# Altium PCB slave.PcbDoc
Units mm, origin at the board's own origin, x right, y up, seen from the top; angles counter-clockwise.
Board outline 42.29 x 53.21 mm, 2 copper layers (Top Layer, Bottom Layer); 30 components, 26 nets, 146 pads, 23 vias.
Unrouted connection lines stored in the file: 19.
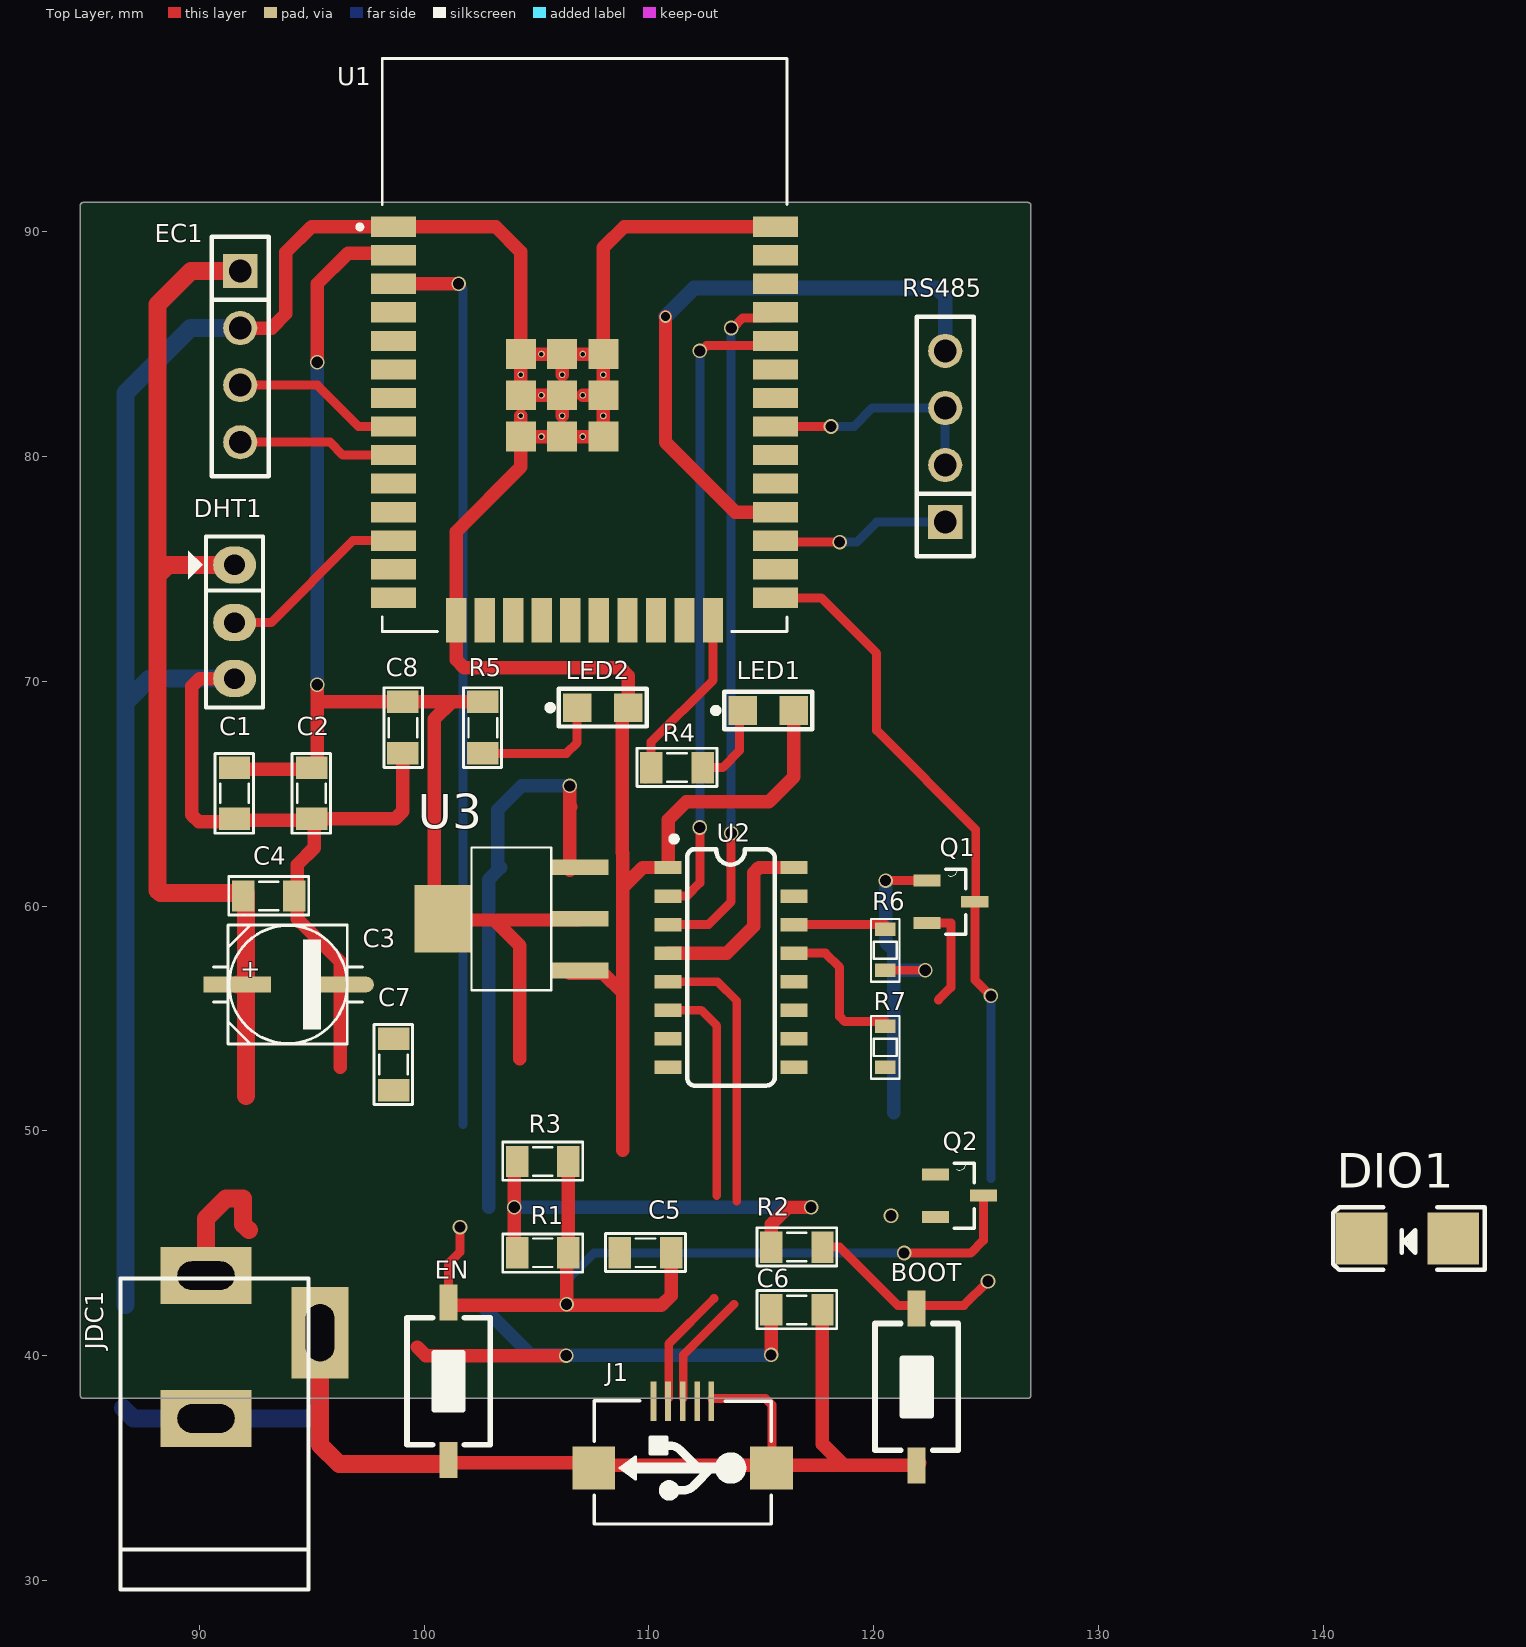
[diagram p0: Top Layer view]
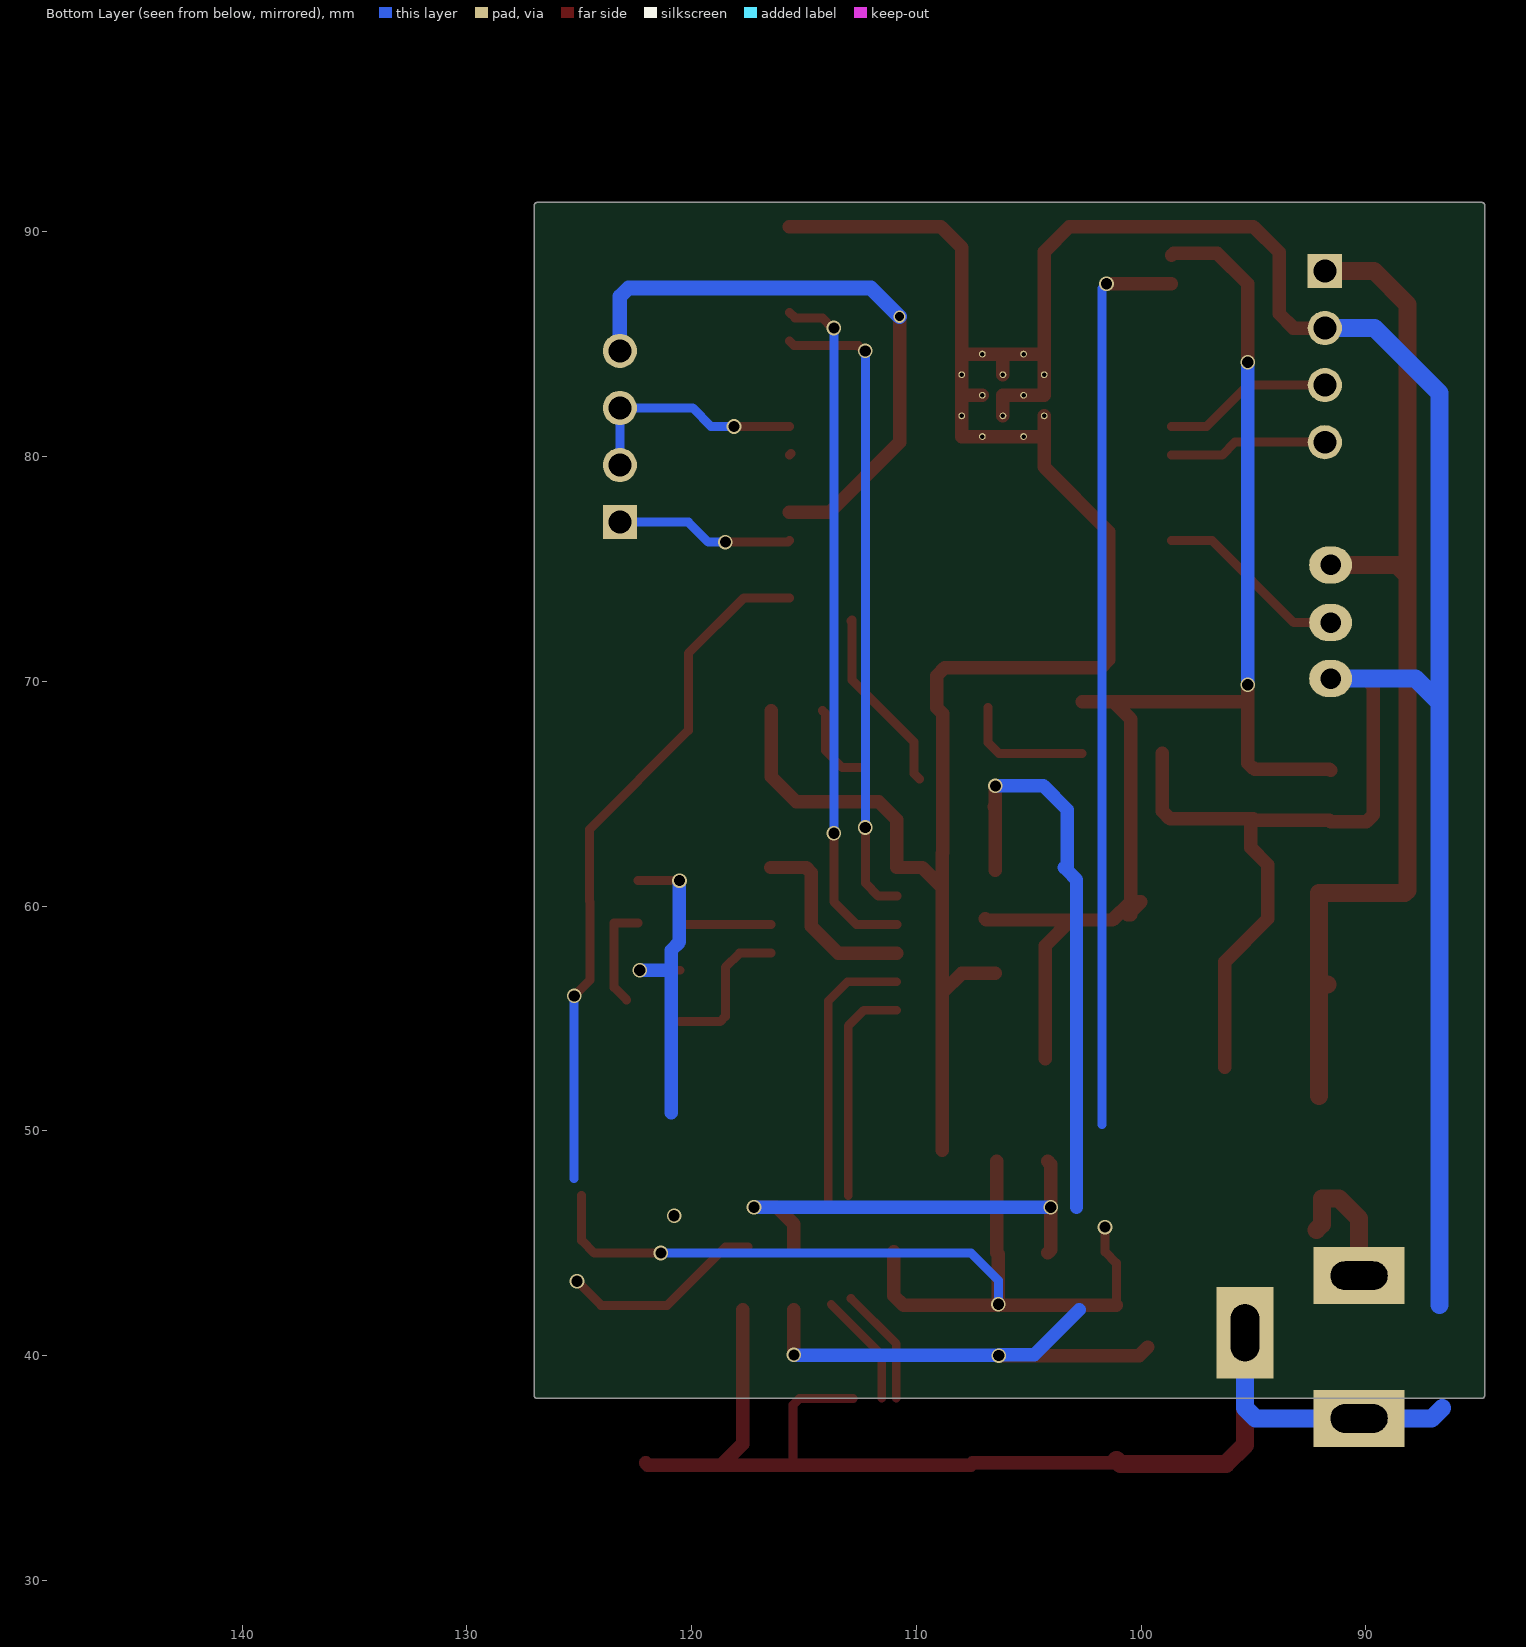
[diagram p1: Bottom Layer view, seen from below]
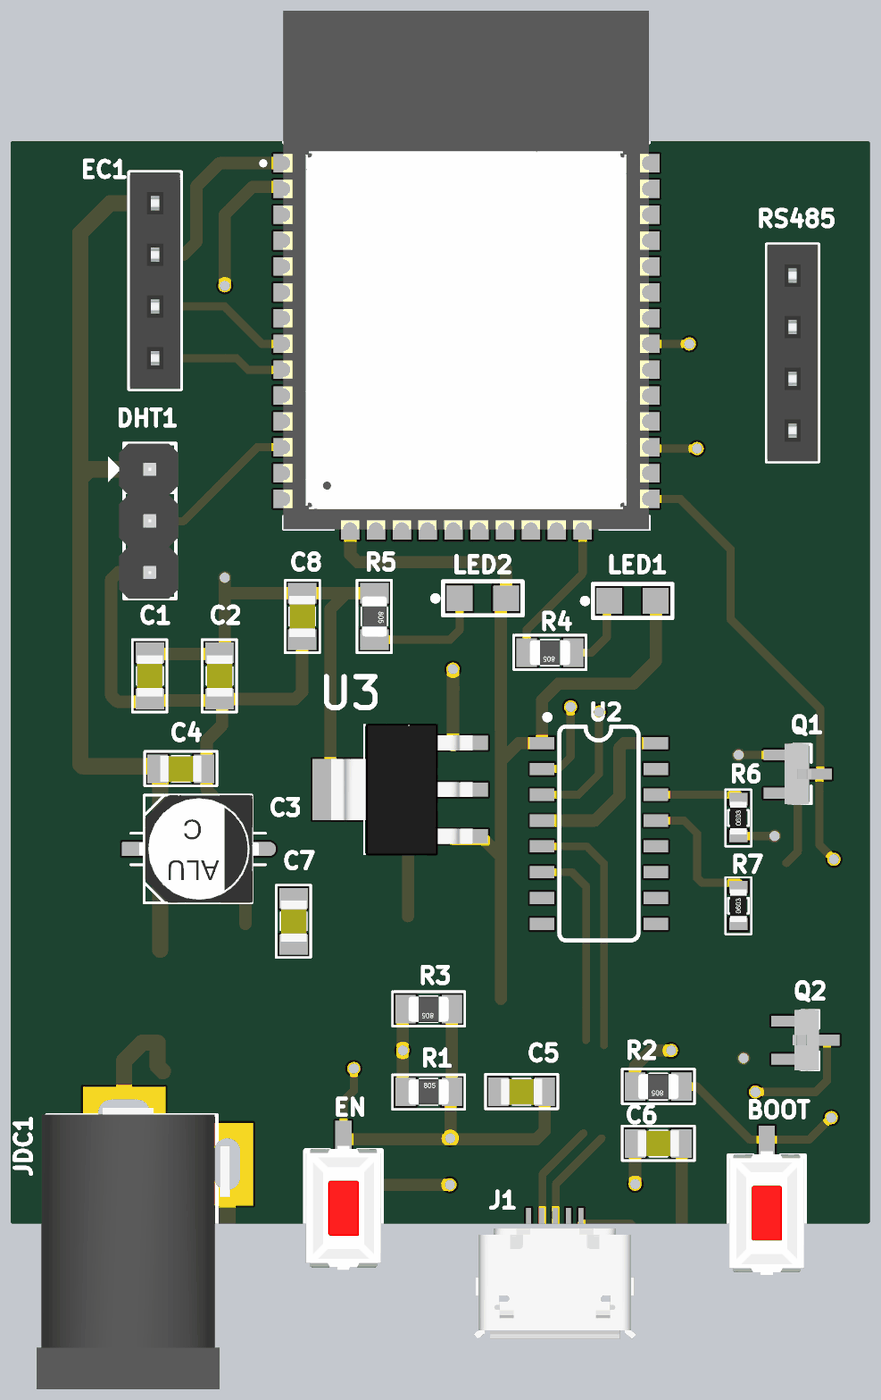
[diagram p2: 3D render of the assembled board from above, using the file's embedded part models]

## Layer stack, top to bottom
Top Solder: solder mask 0.0102, Solder Resist, Dk 3.5
Top Layer: signal copper 0.0356
Dielectric 1: dielectric 0.32, FR-4, Dk 4.8
Bottom Layer: signal copper 0.0356
Bottom Solder: solder mask 0.0102, Solder Resist, Dk 3.5

## Board outline
84.709,38.227 ccw(c84.836,38.227) 84.836,38.1 126.873,38.1 ccw(c126.873,38.227) 127,38.227 127,91.185 127,91.186 ccw(c126.873,91.186) 126.873,91.313 84.836,91.313 ccw(c84.836,91.186) 84.709,91.186

## Design rules (kind name [scope] priority, off if disabled: settings)
Clearance [All] p1: gap=0.254 ignorepadtopadclearanceinfootprint=FALSE
DiffPairsRouting [All] p1: maxlimit=0.254 minlimit=0.254 mostfreqgap=0.254 toplayer_minwidth=0.381 toplayer_maxwidth=0.381 toplayer_prefwidth=0.381 bottomlayer_minwidth=0.381 bottomlayer_maxwidth=0.381 bottomlayer_prefwidth=0.381 maxuncoupledlength=12.7
PolygonConnect [All] p1: connectstyle=Relief reliefconductorwidth=0.254 reliefentries=4 polygonreliefangle="90 Angle" airgapwidth=0.254
RoutingVias [All] p1: holewidth=0.65 width=0.5 viastyle="Through Hole" minholewidth=0.65 minwidth=0.5 maxholewidth=0.65 maxwidth=0.5
SolderMaskExpansion [All] p1: expansion=0.102
Width [All] p1: maxlimit=0.8 minlimit=0.4 preferedwidth=0.6 minimp=50.000000 maximp=50.000000 favimp=50.000000
29 further rules are at their usual default settings.

## Classes and differential pairs
differential pair D0: +D0_P -D0_N

## Components (designator, comment, footprint, x,y, rotation, side; value= is the part's Value field where it differs from the comment)
BOOT "SW" SW-SMD 121.92,38.608 r270 top value="SW chip 2 pin"
C1 "100nF" CAP_0805 91.567,65.024 r270 top value=33p
C2 "10uF" CAP_0805 94.996,65.024 r270 top value=33p
C3 "Cap Pol SMD" CAP-ALU-SMD-C 93.98,56.515 r0 top value=100pF
C4 "104" CAP_0805 93.091,60.452 r180 top value=33p
C5 "1uF" CAP_0805 109.855,44.579 r180 top value=33p
C6 "100nF" CAP_0805 116.586,42.037 r180 top value=33p
C7 "100nF" CAP_0805 98.643,52.959 r270 top value=33p
C8 "100nF" CAP_0805 99.06,67.945 r90 top value=33p
DHT1 "J1" JP3 91.567,72.644 r270 top value=J3
DIO1 "Diode SMD" DIO-SMD-106 143.764,45.212 r0 top value=1N5007
EC1 "C7" JP4-C1T 91.821,88.265 r270 top
EN "SW" SW-SMD 101.092,38.862 r270 top value="SW chip 2 pin"
J1 "USB-5" USB-M1 111.506,37.973 r180 top
JDC1 "Jack DC" DC-IN 92.837,40.386 r90 top value="Jac DC"
LED1 "LED3" LED0805 115.316,68.707 r0 top
LED2 "LED3" LED0805 107.95,68.834 r0 top
Q1 "c1815" SOT95P240X97-3N 123.444,60.198 r0 top
Q2 "c1815" SOT95P240X97-3N 123.825,47.117 r0 top
R1 "10k" RES-SMD-0805 105.283,44.577 r0 top
R2 "10k" RES-SMD-0805 116.586,44.831 r180 top
R3 "10k" RES-SMD-0805 105.283,48.641 r180 top
R4 "1k" RES-SMD-0805 111.252,66.167 r180 top
R5 "1k" RES-SMD-0805 102.616,67.945 r270 top
R6 "10k" RES-SMD-0603 120.523,58.039 r90 top
R7 "10k" RES-SMD-0603 120.523,53.721 r90 top
RS485 "C8" JP4-C1T 123.19,77.089 r90 top (schematic designator rs485)
U1 "ESP32-WROOM-32" MODULE_ESP32-WROOM-32 107.143,84.974 r0 top
U2 "CH340C" SOP-16 113.665,57.277 r270 top
U3 "LM1117-ADJ" LM1117-SOP 105.664,59.436 r90 top

## Footprints (in the part's own frame and the unit in brackets; to place one, negate y for a bottom-side part, rotate by r counter-clockwise, add the part's x,y. Pads: shape width x height; smd on the part's side, far side on the other; paste and mask are expansions set on the pad)
CAP-ALU-SMD-C [mm]
  rect 3x0.7 smd: 1(-2.286,0)
  oval 3x0.7 smd: 2(2.286,0)
  silkscreen extent -3.35,-2.65 3.28,2.65, body extent -2.95,-2.65 2.95,2.65, height 5.41
CAP_0805 [mil]
  rect 39.37x55 smd: 1(-45,0) 2(45,0)
  silkscreen extent -70,-34 70,33, body extent -40,-25 40,25, height 24
DC-IN [mil]
  rect 100x160 hole 50 slot 100 at 90 deg: 1(125,100) 2(-125,100)
  rect 160x100 hole 50 slot 100 at 0 deg: 3(25,-100)
  silkscreen extent -425,-80 120,250, body extent -410,-105 134,269, height 434
DIO-SMD-106 [mil]
  rect 90x90.55 smd: 1(80,0) 2(-80,0)
  silkscreen extent -130,-55 135,55, body extent -99,-50 106,52, height 95
JP3 [mil] "Jumper 3"
  oval 65x75 hole 36: 1(-100,0) 2(1,0) 3(99,0)
  silkscreen extent -150,-81 150,50, body extent -150,-60 150,55, height 355
JP4-C1T [mm] "4 row, straight, gold plating"
  rect 1.52x1.52 hole 1.02: 1(0,0)
  round 1.52 hole 1.02: 2(2.54,0) 3(5.08,0) 4(7.62,0)
  silkscreen extent -1.52,-1.27 9.14,1.27, body extent -1.52,-1.25 9.14,1.25, height 8.51
LED0805 [mil] "Chip Resistor; Body 2.0 x 1.3 mm (LxW typ)"
  rect 50x50 smd: 1(-45,0) 2(45,0)
  silkscreen extent -97,-33 77,33, body extent -60,-25 60,25, height 47
LM1117-SOP [mm]
  rect 0.7x2.54 smd: 1(-2.3,-1.27) 2(0,-1.27) 3(2.3,-1.27)
  rect 3x2.54 smd: 2(0,4.826)
  silkscreen extent -3.18,0 3.17,3.56, body extent -3.25,-1.78 3.25,5.18, height 1.68
MODULE_ESP32-WROOM-32 [mm]
  rect 2x0.9 smd: 1(-8.5,5.26) 2(-8.5,3.99) 3(-8.5,2.72) 4(-8.5,1.45) 5(-8.5,0.18) 6(-8.5,-1.09) 7(-8.5,-2.36) 8(-8.5,-3.63) 9(-8.5,-4.9) 10(-8.5,-6.17) 11(-8.5,-7.44) 12(-8.5,-8.71) 13(-8.5,-9.98) 14(-8.5,-11.25) 25(8.5,-11.25) 26(8.5,-9.98) 27(8.5,-8.71) 28(8.5,-7.44) 29(8.5,-6.17) 30(8.5,-4.9) 31(8.5,-3.63) 32(8.5,-2.36) 33(8.5,-1.09) 34(8.5,0.18) 35(8.5,1.45) 36(8.5,2.72) 37(8.5,3.99) 38(8.5,5.26)
  rect 0.9x2 smd: 15(-5.715,-12.25) 16(-4.445,-12.25) 17(-3.175,-12.25) 18(-1.905,-12.25) 19(-0.635,-12.25) 20(0.635,-12.25) 21(1.905,-12.25) 22(3.175,-12.25) 23(4.445,-12.25) 24(5.715,-12.25)
  rect 1.33x1.33 smd: 39_1(-2.835,-0.405) 39_2(-1,-0.405) 39_3(0.835,-0.405) 39_4(-2.835,-2.24) 39_5(-1,-2.24) 39_6(0.835,-2.24) 39_7(-2.835,-4.075) 39_8(-1,-4.075) 39_9(0.835,-4.075)
  round 0.3 hole 0.2: 39_10(-1.917,-0.405) 39_11(-0.082,-0.405) 39_12(-2.835,-1.323) 39_13(-1,-1.323) 39_14(0.835,-1.323) 39_15(-1.917,-2.24) 39_16(-0.082,-2.24) 39_17(-2.835,-3.158) 39_18(-1,-3.158) 39_19(0.835,-3.158) 39_20(-1.917,-4.075) 39_21(-0.082,-4.075)
  silkscreen extent -10.1,-12.75 9,12.75, body extent -10.54,-12.75 8.98,12.75, height 3.2
RES-SMD-0603 [mm]
  rect 0.6x0.9 smd: 1(-0.889,0) 2(0.927,0)
  silkscreen extent -1.4,-0.64 1.4,0.64, body extent -0.8,-0.4 0.8,0.4, height 0.43
RES-SMD-0805 [mm]
  rect 1x1.397 smd: 1(-1.143,0) 2(1.143,0)
  silkscreen extent -1.78,-0.86 1.78,0.84, body extent -1,-0.62 1,0.63, height 0.8
SOP-16 [mm]
  rect 0.6x1.2 smd: 1(-4.445,-2.8) 2(-3.175,-2.8) 3(-1.905,-2.8) 4(-0.635,-2.8) 5(0.635,-2.8) 6(1.905,-2.8) 7(3.175,-2.8) 8(4.445,-2.8) 9(4.445,2.8) 10(3.175,2.8) 11(1.905,2.8) 12(0.635,2.8) 13(-0.635,2.8) 14(-1.905,2.8) 15(-3.175,2.8) 16(-4.445,2.8)
  silkscreen extent -5.84,-2.67 5.26,1.95, body extent -4.95,-3.47 4.95,3.47, height 1.75
SOT95P240X97-3N [mil]
  rect 48x21 smd: 1(-42,37) 2(-42,-37) 3(42,0)
  silkscreen extent -9,-57 26,57, body extent -25,-60 26,60, height 79
SW-SMD [mm] "Switch SMD type"
  rect 1.6x0.8 smd: 1(-3.5,0) 2(3.5,0)
  silkscreen extent -2.82,-1.85 2.82,1.85, body extent -3.05,-1.85 3.05,1.85, height 2.5
USB-M1 [mil]
  rect 10x70 smd: 1(51.18,0) 2(25.59,0) 3(0,0) 4(-25.59,0) 5(-50,0)
  rect 74.8x74.8 smd: 5(-155.51,116.84) 5(155.51,116.84)
  silkscreen extent -155,-1 155,215, body extent -157,5 158,218, height 107

## Part data
BOOT EN: library part SW2, "Switch button 2 pin"
C1 C2 C4 C5 C6 C7 C8: library part CapSMD, "Capacitor", LatestRevisionDate=17-Jul-2002, LatestRevisionNote="Re-released for DXP Platform.", PackageReference=RAD-0.3, Published=8-Jun-2000, Publisher="Altium Limited"
C3: "Polarized Capacitor (Radial)"
DHT1: library part JP3, "Jumper 3"
DIO1: "Default Diode", Code - JEDEC=DO-214-AB, Published=8-Jun-2000, Publisher="Altium Limited", Revision="July-2002: Re-released for DXP Platform."
EC1 RS485: library part JP4, "WR-PHD 2.54 mm Angled Socket Header", Manufacturer="Würth Elektronik eiSos GmbH", partNo=613004143121, ComponentLink1 Description=Manufacturer, ComponentLink1URL=http://www.we-online.com, ComponentLink2 Description=Datasheet, ComponentLink2URL=http://katalog.we-online.de/em/datasheet/6130xx143121.pdf, Created by="Karrer Zheng", Created Date="29 March 2013", NoPins=04
J1: Manufacturer=FCI, Manufacturer Part Number=10118193-0001LF, Supplier Part Number 1=609-4616-1-ND, .Checked PCB=RF, .Checked SCH=MM, .Creator=MM, Category="Connectors, Interconnects", ComponentLink1Description=http://portal.fciconnect.com/Comergent//fci/drawing/10118193.pdf, ComponentLink1URL=http://portal.fciconnect.com/Comergent//fci/drawing/10118193.pdf, Connector Type="USB - micro B", Features="Shielded, Solder Retention", Gender=Receptacle, Ingress Protection=-, Mounting Type="Surface Mount, Right Angle, Horizontal", Number of Contacts=5, Packaging="Cut Tape (CT)", Pricing 1="1=0.46, 10=0.433, 25=0.3712, 50=0.3156, 100=0.3032, 250=0.27224, 500=0.25988 (USD)", RoHS="RoHS Compliant", Specifications="USB 2.0", Stock 1=28642, Supplier 1=Digi-Key
JDC1: "Jack DC input"
LED1 LED2: library part LED0805, "LED SMD 0805"
Q1 Q2: library part BC817, "Bipolar (BJT) Transistor NPN 45V 500mA 100MHz 250mW Surface Mount TO-236AB", Package="SOT-23-3 Rectron", Availability="In Stock", Check_prices=https://www.snapeda.com/parts/BC817/Rectron/view-part/?ref=eda, MF=Rectron, MP=BC817, Price=None, Purchase-URL=https://pricing.snapeda.com/search/part/BC817/?ref=eda, SnapEDA_Link=https://www.snapeda.com/parts/BC817/Rectron/view-part/?ref=snap
R1 R2 R3 R4 R6 R7: library part "Resistor - SMD", "Resistor", Manufacturer="Generic Components", Class=Passive, Published=08/06/2000, Publisher="Altium Hobart Technology Centre"
R5: library part "Resistor - SMD", "22", Manufacturer="Generic Components", Class=Passive, Published=08/06/2000, Publisher="Altium Hobart Technology Centre"
U1: "Bluetooth, WiFi 802.11b/g/n, Bluetooth v4.2 +EDR, Class 1, 2 and 3 Transceiver Module 2.4GHz ~ 2.5GHz Antenna Not Included, U.FL Surface Mount", Package="Module Espressif Systems", Availability="In Stock", Check_prices=https://www.snapeda.com/parts/ESP32-WROOM-32/Espressif+Systems/view-part/?ref=eda, MF="Espressif Systems", MP=ESP32-WROOM-32, Price=None, Purchase-URL=https://pricing.snapeda.com/search/part/ESP32-WROOM-32/?ref=eda, SnapEDA_Link=https://www.snapeda.com/parts/ESP32-WROOM-32/Espressif+Systems/view-part/?ref=snap
U2: "USB to serial chip CH340", Package=Package, Availability=Unavailable, Check_prices=https://www.snapeda.com/parts/CH340C/WCH/view-part/5428851/?ref=eda, MF=WCH, MP=CH340C, Price=None, SnapEDA_Link=https://www.snapeda.com/parts/CH340C/WCH/view-part/5428851/?ref=snap
U3: "800mA Low-Dropout Linear Regulator", Creator="Nguyen Ba Bien", Website=http://group3i.net

## Via types
v1: diameter 0.65, hole 0.5, Top Layer to Bottom Layer, 17 vias
v2: diameter 0.65, hole 0.5, Top Layer to Bottom Layer, tented both sides, 5 vias
v3: diameter 0.55/0.55 (per signal layer), hole 0.4, Top Layer to Bottom Layer, tented both sides, 1 vias

## Nets (pads, with @x,y where several pads share a name; then routed paths per layer and width w, separated by ;. In a path a pad name is that pad's centre, name@x,y a point inside that pad or via, vN(x,y) a via of type N, cw(c..) or ccw(c..) an arc to the next point about the centre after c; other vN are vias at no path point)
3V3: C1.1 C2.1 C8.2 R1.1 R2.2 R3.2 R5.1 U1.2 U2.4 U2.16 U3.2 | length 90
  Top Layer w0.6: C1.1@91.567,66.04 91.631,66.104 C2.1@94.932,66.104 ; C2.1 95.049,66.167 95.249,66.367 95.249,69.088 ; v2(95.249,69.85) 95.249,69.088 ; v1(95.25,84.201) 95.25,87.691 96.616,89.058 98.55,89.058 U1.2 ; U3.2@100.457,59.615 U3.2@100.457,59.742 ; U3.2@100.584,59.615 U3.2@100.457,59.742 ; R5.1 101.219,69.088 ; R1.1 104.013,44.704 v1(104.013,46.609) 104.013,48.514 R3.2 ; 104.267,53.213 104.267,58.243 103.124,59.386 ; U3.2@106.934,59.436 106.884,59.386 103.124,59.386 ; U2.4 113.474,57.912 114.673,59.111 114.673,61.49 114.905,61.722 U2.16 ; R2.2 115.443,45.847 116.205,46.609 v1(117.221,46.609) ; 95.25,69.088 C8.2 101.219,69.088 ; U3.2@100.457,59.742 U3.2@100.457,60.198 ; U3.2@100.457,59.742 100.001,60.198 U3.2@100.457,60.198 ; U3.2@100.457,60.198 101.269,59.386 103.124,59.386 ; U3.2@100.457,60.198 100.457,68.326 101.219,69.088
  Bottom Layer w0.6: v2(95.249,69.85) v1(95.25,84.201) ; v1(104.013,46.609) v1(117.221,46.609)
A0: EC1.4 U1.9 | length 7.3
  Top Layer w0.4: EC1.4@91.567,80.645 95.822,80.645 96.393,80.074 U1.9
D0_N: J1.3 U2.5 | length 17.5
  Top Layer w0.38: U2.5 113.061,56.642 113.919,55.784 113.919,46.863 ; J1.3@111.536,38.1 111.536,40.035 113.792,42.291
D0_P: J1.2 U2.6 | length 15.3
  Top Layer w0.381: U2.6 112.339,55.372 113.03,54.681 113.03,47.117 ; J1.2@110.886,38.1 110.886,40.528 112.903,42.545
DATA: DHT1.2 U1.12 | length 8.5
  Top Layer w0.4: DHT1.2@91.694,72.619 93.193,72.619 96.838,76.264 U1.12
GND: BOOT.2 C1.2 C2.2 C3.2 C4.1 C5.2 C6.1 C7.1 C8.1 DHT1.3 EC1.2 EN.2 J1.5 JDC1.2 JDC1.3 LED1.2 LED2.2 U1.1 U1.15 U1.38 U1.39_1 U1.39_2 U1.39_3 U1.39_4 U1.39_5 U1.39_6 U1.39_7 U1.39_8 U1.39_9 U1.39_10 U1.39_11 U1.39_12 U1.39_13 U1.39_14 U1.39_15 U1.39_16 U1.39_17 U1.39_18 U1.39_19 U1.39_20 U1.39_21 U2.1 U3.1 | length 250.5
  Top Layer w0.4: J1.5@112.806,38.1 115.189,38.1 115.486,37.803 J1.5@115.486,35.132
  Top Layer w0.6: DHT1.3@91.694,70.129 DHT1.3 90.013,70.129 89.662,69.778 89.662,64.061 89.969,63.754 91.567,63.754 91.631,63.818 C2.2@94.734,63.818 ; EC1.2 93.218,85.725 93.853,86.36 93.853,89.092 94.995,90.234 U1.1 103.187,90.234 104.309,89.112 U1.39_1 ; C2.2 98.709,63.881 99.06,64.233 C8.1 ; C2.2@95.123,63.556 95.123,62.611 94.361,61.849 94.361,59.436 96.266,57.531 C3.2 96.266,56.053 ; JDC1.3 JDC1.3@95.575,41.219 ; 96.266,52.83 96.266,55.961 ; EN.2@101.092,35.235 107.483,35.235 107.586,35.132 115.486,35.132 118.665,35.132 ; U1.39_17 U1.39_7 ; U1.39_18 U1.39_5 U1.39_15 U1.39_4 U1.39_12 U1.39_1 ; U1.39_13 U1.39_2 ; U3.1@106.492,57.023 106.478,57.009 U3.1@106.934,57.009 ; U3.1@106.807,57.009 107.978,57.009 108.839,56.148 ; U1.39_16 U1.39_6 ; 108.839,49.149 108.839,56.148 ; U1.38 108.903,90.234 107.978,89.309 U1.39_3 ; LED1.2 116.459,65.756 115.346,64.643 111.662,64.643 110.865,63.846 U2.1 109.728,61.722 108.839,60.833 ; C6.1 117.729,36.068 118.665,35.132 ; BOOT.2@122.047,35.235 121.944,35.132 119.126,35.132 118.665,35.132 ; U1.39_7 U1.39_20 U1.39_8 U1.39_21 U1.39_9 U1.39_19 U1.39_6 ; U1.39_7 104.309,79.544 101.428,76.663 U1.15 101.428,70.963 101.78,70.612 108.742,70.612 109.093,70.261 LED2.2 108.828,68.569 108.828,62.368 108.839,62.357 108.839,60.833 ; U1.39_1 U1.39_10 U1.39_2 ; U1.39_2 U1.39_11 U1.39_3 ; U1.39_6 U1.39_14 U1.39_3 ; 108.839,56.148 108.839,60.833
  Top Layer w0.8: JDC1.3 95.377,36.029 96.227,35.179 100.909,35.179 EN.2
  Bottom Layer w0.8: 86.596,37.68 87.065,37.211 JDC1.2 94.908,37.211 95.377,37.68 JDC1.3 ; 86.723,42.252 86.723,69.07 ; EC1.2@91.567,85.725 89.607,85.725 86.723,82.841 86.723,69.07 ; DHT1.3@91.694,70.129 DHT1.3 87.782,70.129 86.723,69.07
IO2: R4.2 U1.24 | length 8.4
  Top Layer w0.4: R4.2@109.855,65.659 110.109,65.913 R4.2 110.109,67.31 112.858,70.059 U1.24 U1.24@112.903,72.68
IO_0: BOOT.1 Q1.3 R2.1 U1.25 | length 40.2
  Top Layer w0.4: U1.25 117.665,73.724 120.142,71.247 120.142,67.818 124.548,63.412 124.548,60.236 Q1.3 124.511,56.718 v1(125.222,56.007) ; R2.1@117.481,44.831 R2.1 118.491,44.831 121.087,42.235 124.023,42.235 v1(125.095,43.307)
  Bottom Layer w0.4: 125.222,47.879 v1(125.222,56.007)
NetDIO1_1: DIO1.1 J1.1
NetLED1_1: LED1.1 R4.1 | length 3.8
  Top Layer w0.4: R4.1 113.284,66.167 114.046,66.929 114.046,68.58 LED1.1
NetLED2_1: LED2.1 R5.2 | length 5.9
  Top Layer w0.4: R5.2 106.329,66.802 106.807,67.28 LED2.1
NetQ1_1: Q1.1 R6.1 | length 15.6
  Top Layer w0.4: v2@120.485,61.087 v2(120.536,61.138) Q1.1 ; R6.1 v2(122.301,57.15)
  Bottom Layer w0.6: v2(120.536,61.138) 120.536,58.407 120.897,58.046 120.897,57.023 ; 120.904,50.8 120.904,57.016 120.897,57.023 ; v2(122.301,57.15) 121.024,57.15 120.897,57.023
  other v2: 120.777,46.228
NetQ1_2: Q1.2 R7.2 U2.13 | length 11.3
  Top Layer w0.4: U2.13 117.856,57.912 118.491,57.277 118.491,55.098 118.725,54.864 R7.2@120.523,54.864 ; Q1.2 123.444,59.258 123.444,56.388 122.885,55.829
NetQ2_1: Q2.1 R7.1
NetQ2_2: Q2.2 R6.2 U2.14 | length 4.1
  Top Layer w0.4: U2.14 R6.2@120.523,59.182
RD0: U1.30 | length 0.1
  Top Layer w0.4: U1.30@115.581,80.137 U1.30
RD1: RS485.2 RS485.3 U1.31 | length 10.4
  Top Layer w0.4: U1.31 v1(118.11,81.344)
  Bottom Layer w0.4: v1(118.11,81.344) 119.127,81.344 119.952,82.169 RS485.3 RS485.2
RESET: C5.1 EN.1 Q2.3 R1.2 R3.1 U1.3 | length 84.8
  Top Layer w0.4: EN.1@101.092,42.235 EN.1 101.092,44.114 101.6,44.622 v1(101.6,45.72) ; v1(121.361,44.568) 124.324,44.568 124.892,45.136 Q2.3
  Top Layer w0.6: U1.3 v2(101.536,87.694) ; EN.1@101.092,42.235 110.561,42.235 110.998,42.672 C5.1@110.998,44.621 ; v1(106.344,42.291) 106.353,42.301 106.353,44.505 R1.2 R3.1
  Bottom Layer w0.4: v2(101.536,87.694) 101.536,87.667 101.727,87.476 101.727,50.292 ; v1(106.344,42.291) 106.344,43.352 107.56,44.568 v1(121.361,44.568)
RX: U1.35 U2.3 | length 31
  Top Layer w0.4: U2.3 112.649,59.182 113.665,60.198 v1(113.665,63.246) ; v1(113.665,85.725) 113.733,85.725 114.182,86.174 115.394,86.174 U1.35
  Bottom Layer w0.4: v1(113.665,63.246) v1(113.665,85.725)
RX1: RS485.1 U1.27 | length 8.3
  Top Layer w0.4: U1.27 115.708,76.2 v1(118.491,76.2)
  Bottom Layer w0.4: v1(118.491,76.2) 119.253,76.2 120.142,77.089 RS485.1 RS485.1@122.936,76.835
RX2: U1.17
T0: EC1.3 U1.8 | length 7.8
  Top Layer w0.4: EC1.3@91.567,83.185 95.25,83.185 97.091,81.344 U1.8
TX: U1.34 U2.2 | length 28.9
  Top Layer w0.4: U2.2 111.682,60.452 112.268,61.038 v1(112.268,63.5) ; v1(112.268,84.709) 112.336,84.709 112.573,84.946 115.435,84.946 U1.34
  Bottom Layer w0.4: v1(112.268,63.5) v1(112.268,84.709)
TX1: RS485.4 U1.28 | length 27.5
  Top Layer w0.6: v3(110.744,86.233) 110.744,80.645 113.855,77.534 U1.28
  Bottom Layer w0.66: v3(110.744,86.233) 112.014,87.503 122.809,87.503 123.19,87.122 RS485.4 RS485.4@123.091,84.808
TX2: U1.18
VCC: C3.1 C4.2 C6.2 C7.2 DHT1.1 DIO1.2 EC1.1 JDC1.1 U3.3 | length 101.4
  Top Layer w0.4: v1@106.283,40.005 106.299,40.021 106.299,40.035 v1(106.329,40.005)
  Top Layer w0.6: 99.695,40.386 100.076,40.005 v1@106.283,40.005 ; U3.3@106.478,61.609 106.478,61.736 106.478,64.389 ; v1(106.478,65.353) 106.478,64.389 ; 106.52,64.431 106.478,64.389 ; v1(115.443,40.035) C6.2
  Top Layer w0.8: JDC1.1 90.297,46.101 91.186,46.99 91.948,46.99 91.948,45.847 92.202,45.593 ; DHT1.1 88.607,75.184 88.138,74.715 ; EC1.1@91.567,88.265 89.623,88.265 88.138,86.78 88.138,74.715 ; DHT1.1 91.631,75.121 DHT1.1@91.694,75.184 ; C3.1 92.025,56.515 92.075,56.465 92.075,51.562 ; 92.075,56.162 92.075,56.515 92.075,60.452 92.075,60.579 91.948,60.579 88.265,60.579 88.138,60.706 88.138,74.715
  Bottom Layer w0.4: v1(106.329,40.005) v1@106.344,40.02 ; v1@115.428,40.02 v1(115.443,40.035)
  Bottom Layer w0.6: 102.743,42.037 104.745,40.035 106.299,40.035 v1(106.329,40.005) ; 102.87,46.609 102.87,61.179 103.286,61.595 ; 103.413,61.722 103.286,61.595 ; v1@106.344,40.02 v1@115.428,40.02 ; v1@106.351,65.353 104.342,65.353 103.286,64.297 103.286,61.595
pads on no net: J1.4 U1.4 U1.5 U1.6 U1.7 U1.10 U1.11 U1.13 U1.14 U1.16 U1.19 U1.20 U1.21 U1.22 U1.23 U1.26 U1.29 U1.32 U1.33 U1.36 U1.37 U2.7 U2.8 U2.9 U2.10 U2.11 U2.12 U2.15

## Polygon pours and split planes (outlines as drawn)
no net on Top Layer "Top Layer-No Net 1" (solid, pour order 18): 84.201,89.916
no net on Top Layer "Top Layer-No Net 2" (solid, pour order 16): 84.074,89.662
no net on Bottom Layer "Bottom Layer-No Net 1" (solid, pour order 26): 91.821,96.012

## Text inside footprints (layer, text, board x,y; h text height)
C3: Top Overlay "+" at 91.83,56.84 h0.8
U1: Mechanical 13 "ANTENNA" at 101.143,93.974 h1.78